# Altium PCB HANDS_FREE_ControlUnit_V2.PcbDoc (part 2 of 3)
Units mil, origin at the board's own origin, x right, y up, seen from the top; angles counter-clockwise.
Board outline 2130 x 3330 mil, 2 copper layers (Top Layer, Bottom Layer); 111 components, 108 nets, 500 pads, 191 vias.
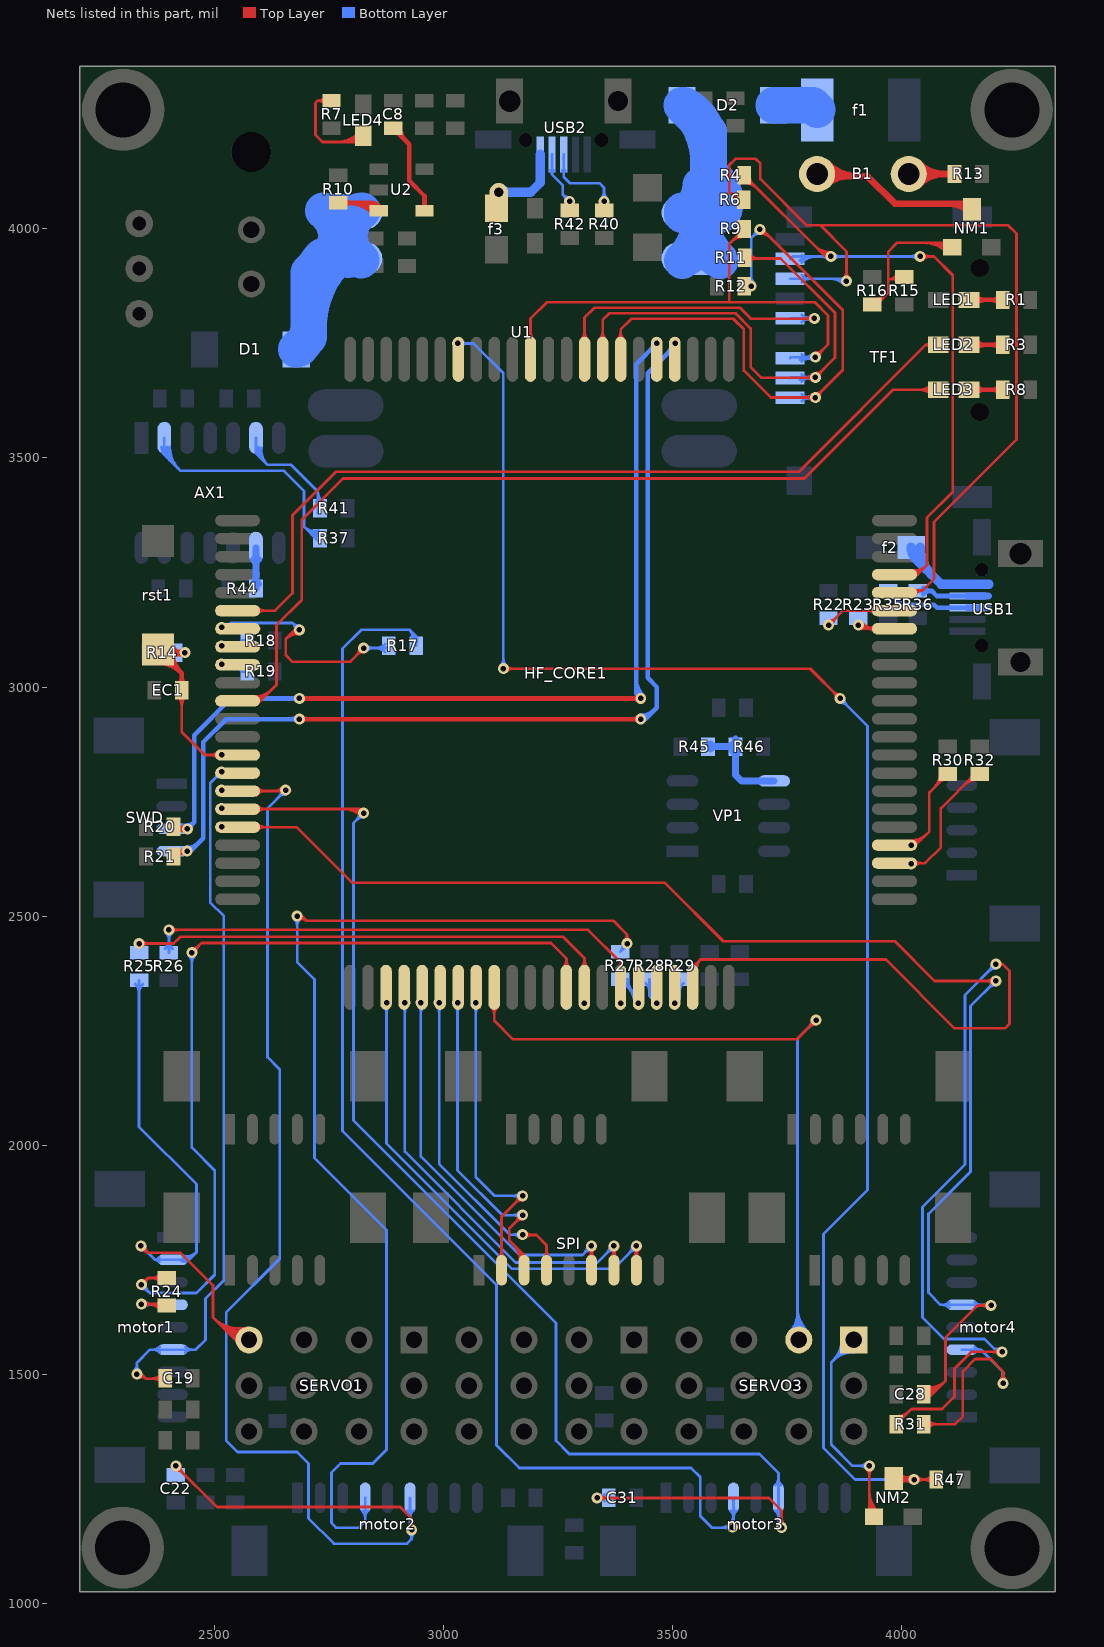
[diagram p2: the nets of this part, all layers, seen from the top]

## Via types
v1: diameter 24, hole 12, Top Layer to Bottom Layer, 168 vias
v2: diameter 40, hole 20, Top Layer to Bottom Layer, 10 vias
v3: diameter 30, hole 15, Top Layer to Bottom Layer, 10 vias
v4: diameter 80, hole 40, Top Layer to Bottom Layer, 3 vias

## Nets (pads, with @x,y where several pads share a name; then routed paths per layer and width w, separated by ;. In a path a pad name is that pad's centre, name@x,y a point inside that pad or via, vN(x,y) a via of type N, cw(c..) or ccw(c..) an arc to the next point about the centre after c; other vN are vias at no path point) (continued)
LED2: HF_CORE1.6 LED2.2 | length 1929
  Top Layer w6: HF_CORE1.6@2550,3166.64 2631.64,3166.64 2670,3205 2670,3375 2765,3470 3775,3470 4052,3747 ; HF_CORE1.6@2593.43,3159.92 cw(c2609.65,3143.71) 2609.65,3166.64 cw(c2609.65,3189.58) HF_CORE1.6@2593.43,3173.36 ; LED2.2@4061.33,3740.97 ccw(c4052,3736.77) 4052,3747 ; LED2.2@4061.33,3753.03 cw(c4052,3757.23) 4052,3747 ; LED2.2@4079.54,3747 4052,3747
LED3: HF_CORE1.11 LED3.2 | length 2183.4
  Top Layer w6: HF_CORE1.11@2550,2969.79 2599.79,2969.79 ; HF_CORE1.11@2586.71,2967.29 ccw(c2586.71,2992.83) 2604.77,2974.77 ; HF_CORE1.11@2586.71,2973.29 ccw(c2586.71,3013.31) 2615.01,2985.01 ; HF_CORE1.11@2586.71,2979.29 ccw(c2586.71,3033.8) 2625.25,2995.25 ; HF_CORE1.11@2595.75,2966.85 cw(c2599.79,2965.54) 2599.79,2969.79 ; HF_CORE1.11@2595.75,2972.73 ccw(c2599.79,2974.04) 2599.79,2969.79 ; LED3.2@4064.35,3638.59 ccw(c4039.22,3613.47) 4039.22,3649 ccw(c4039.22,3684.53) LED3.2@4064.35,3659.41 ; LED3.2@4068.59,3642.84 ccw(c4053.71,3627.96) 4053.71,3649 ccw(c4053.71,3670.04) LED3.2@4068.59,3655.16 ; LED3.2@4079.54,3649 3980.97,3649 3786.97,3455 2780,3455 2690,3365 2690,3190 2635,3135 2635,3005 2599.79,2969.79
MOTOR1_ADC: C19.2 HF_CORE1.15 motor1.6 | length 1784.2
  Top Layer w6: v1(2330,1500) 2340,1500 2350,1490 ; v1@2331.47,1497.38 cw(c2336.76,1487.96) 2344.4,1495.6 ; v1@2334.4,1492.15 cw(c2340.78,1480.78) 2350,1490 ; 2360.62,1490 ccw(c2360.62,1522.38) C19.2@2383.51,1499.48 ; 2365.44,1490 cw(c2365.44,1464.44) C19.2@2383.51,1482.51 ; 2375.1,1490 ccw(c2375.1,1507.9) C19.2@2387.76,1495.24 ; C19.2@2392,1508 C19.2@2392,1491 2391,1490 2350,1490
  Bottom Layer w6: v1@2323.64,1506.36 ccw(c2308.27,1521.73) 2330,1521.73 ccw(c2351.73,1521.73) v1@2336.36,1506.36 ; v1(2330,1500) 2330,1525 2358.57,1553.57 motor1.6@2408,1553.57 2458.57,1553.57 2480,1575 2480,1665 2520,1705 2520,2500 2490,2530 2490,2790 v1(2515,2815) ; motor1.6@2380.12,1547.34 ccw(c2365.07,1532.3) 2365.07,1553.57 ccw(c2365.07,1574.85) motor1.6@2380.12,1559.81 ; motor1.6@2435.88,1547.34 cw(c2450.93,1532.3) 2450.93,1553.57 cw(c2450.93,1574.85) motor1.6@2435.88,1559.81 ; v1@2506,2815 cw(c2484.27,2815) 2499.64,2799.64 cw(c2515,2784.27) v1@2515,2806
MOTOR1_EN: motor1.4 R24.2 | length 289.4
  Top Layer w6: v1(2340,1653) 2392,1653 R24.2@2395,1650 ; v1@2346.36,1646.64 cw(c2361.73,1631.27) 2361.73,1653 cw(c2361.73,1674.73) v1@2346.36,1659.36 ; 2353.79,1653 cw(c2353.79,1613.78) R24.2@2381.52,1641.51 ; R24.2@2381.52,1658.48 cw(c2368.27,1671.73) 2368.27,1653 cw(c2368.27,1628.27) R24.2@2385.76,1645.76
  Bottom Layer w6: v1@2341.43,1651.57 motor1.4@2408,1651.57 ; v1@2346.36,1646.64 cw(c2358.29,1634.71) 2358.29,1651.57 ; v1@2346.36,1659.36 ccw(c2365.17,1678.17) 2365.17,1651.57 ; motor1.4@2380.12,1645.34 ccw(c2365.07,1630.3) 2365.07,1651.57 ccw(c2365.07,1672.85) motor1.4@2380.12,1657.81
MOTOR2_ADC: C22.2 HF_CORE1.16 motor2.6 | length 3157.4
  Top Layer w6: v1@2415,1291 cw(c2415,1269.27) 2430.36,1284.64 cw(c2445.73,1300) v1@2424,1300 ; v1(2415,1300) 2505,1210 2905,1210 2930,1185 v1(2930,1160) ; HF_CORE1.16@2552.06,2775 HF_CORE1.16@2550,2772.94 v1@2665,2772.94 ; HF_CORE1.16@2593.43,2766.22 cw(c2609.65,2750.01) 2609.65,2772.94 cw(c2609.65,2795.88) HF_CORE1.16@2593.43,2779.66 ; 2628.3,2772.94 ccw(c2628.3,2801.7) v1@2648.64,2781.36 ; 2638.25,2772.94 cw(c2638.25,2758.25) v1@2648.64,2768.64 ; 2642.78,2772.94 ccw(c2642.78,2787.22) v1@2652.88,2777.12 ; v1@2923.64,1166.36 ccw(c2908.27,1181.73) 2930,1181.73 ccw(c2951.73,1181.73) v1@2936.36,1166.36
  Bottom Layer w6: v1@2646,2775 cw(c2624.27,2775) 2639.64,2759.64 cw(c2655,2744.27) v1@2655,2766 ; v1(2655,2775) 2615,2735 2615,2192 2642,2165 2642,1752 2525,1635 2525,1355 2550,1330 2680,1330 2705,1305 2705,1185 2760,1130 2920,1130 2930,1140 ; motor2.6@2920.19,1202.12 cw(c2905.15,1187.07) 2926.43,1187.07 cw(c2947.7,1187.07) motor2.6@2932.66,1202.12 ; v1@2923.64,1166.36 ccw(c2916.9,1173.1) 2926.43,1173.1 ; v1@2924.03,1153.26 cw(c2912.28,1140) 2930,1140 ; v1@2926.43,1163.57 motor2.6@2926.43,1230 ; 2926.43,1175.87 ccw(c2945.87,1175.87) v1@2932.12,1162.12 ; 2926.43,1190.36 ccw(c2960.36,1190.36) v1@2936.36,1166.36 ; v1(2930,1160) 2930,1140 ; v1@2935.97,1153.26 ccw(c2947.72,1140) 2930,1140
  other v1: 2515,2775
MOTOR2_EN: motor2.4 R27.2 | length 2570.5
  Top Layer w6: v1(2680,2500) 2690,2500 2700,2490 ; v1@2681.47,2497.38 cw(c2686.76,2487.96) 2694.4,2495.6 ; v1@2684.4,2492.15 cw(c2690.78,2480.78) 2700,2490 ; v1@3394.03,2446.74 ccw(c3382.28,2460) 3400,2460 ; v1(3400,2440) 3400,2460 ; v1@3405.97,2446.74 cw(c3417.72,2460) 3400,2460 ; 2700,2490 3370,2490 3400,2460
  Bottom Layer w6: v1@2673.64,2493.64 cw(c2658.27,2478.27) 2680,2478.27 cw(c2701.73,2478.27) v1@2686.36,2493.64 ; v1(2680,2500) 2680,2400 2718,2362 2718,1972 2875,1815 2875,1335 2845,1305 2775,1305 2755,1285 2755,1175 2765,1165 2815,1165 2828.43,1178.43 motor2.4@2828.43,1230 ; motor2.4@2822.19,1202.12 cw(c2807.15,1187.07) 2828.43,1187.07 cw(c2849.7,1187.07) motor2.4@2834.66,1202.12 ; R27.2@3389.76,2426.76 cw(c3400,2416.52) R27.2@3400,2431 ; v1@3391.05,2439.06 cw(c3370.13,2436.88) R27.2@3385,2422 3400,2437 v1(3400,2440)
MOTOR3_ADC: C31.2 HF_CORE1.17 motor3.6 | length 3388.8
  Top Layer w6: HF_CORE1.17@2550,2733.57 2816.43,2733.57 ; HF_CORE1.17@2593.43,2726.85 cw(c2609.65,2710.64) 2609.65,2733.57 cw(c2609.65,2756.51) HF_CORE1.17@2593.43,2740.29 ; 2782.58,2733.57 cw(c2782.58,2682.58) v1@2818.64,2718.64 ; 2797.07,2733.57 cw(c2797.07,2697.07) v1@2822.88,2722.88 ; 2811.55,2733.57 cw(c2811.55,2711.55) v1@2827.12,2727.12 ; v1@2817.07,2729.25 ccw(c2813.84,2730.98) 2816.43,2733.57 ; v1@2820.75,2732.93 cw(c2819.02,2736.16) 2816.43,2733.57 ; v1(2825,2725) 2816.43,2733.57 ; v1(3335,1230) 3710,1230 3737.5,1202.5 v1(3737.5,1165) ; v1@3341.36,1223.64 cw(c3356.73,1208.27) 3356.73,1230 cw(c3356.73,1251.73) v1@3341.36,1236.36 ; v1@3731.14,1171.36 ccw(c3715.77,1186.73) 3737.5,1186.73 ccw(c3759.23,1186.73) v1@3743.86,1171.36
  Bottom Layer w6: v1@2816,2725 cw(c2794.27,2725) 2809.64,2709.64 cw(c2825,2694.27) v1@2825,2716 ; v1(2825,2725) 2803,2703 2803,2053.97 3245,1611.97 3245,1355 3274,1326 3689,1326 3730.43,1284.57 motor3.6@3730.43,1230 v1@3730.43,1172.07 ; v1@3341.36,1223.64 cw(c3356.73,1208.27) 3356.73,1230 cw(c3356.73,1251.73) v1@3341.36,1236.36 ; C31.2@3350.64,1222.49 ccw(c3335,1209.96) v1(3335,1230) ; C31.2@3350.64,1237.51 cw(c3335,1250.04) v1(3335,1230) ; C31.2@3360,1230 v1(3335,1230) ; motor3.6@3724.19,1202.12 cw(c3709.15,1187.07) 3730.43,1187.07 cw(c3751.7,1187.07) motor3.6@3736.66,1202.12 ; motor3.6@3724.19,1257.88 ccw(c3709.15,1272.93) 3730.43,1272.93 ccw(c3751.7,1272.93) motor3.6@3736.66,1257.88 ; 3730.43,1174.84 ccw(c3747.34,1174.84) v1@3735.38,1162.88 ; 3730.43,1189.32 ccw(c3761.82,1189.32) v1@3739.62,1167.12 ; motor3.6@3730.43,1203.81 ccw(c3776.31,1203.81) v1@3743.86,1171.36
  other v1: 2515,2735
MOTOR3_EN: motor3.4 R17.2 | length 2973.3
  Top Layer w6: v1(3630,1166) v1@3632,1168
  Bottom Layer w6: R17.2@2929.2,3100.22 ccw(c2909.66,3109.66) 2925,3125 ; 2930.97,3119.03 cw(c2917.71,3105.77) R17.2@2934.6,3097.61 ; 2936.94,3113.06 cw(c2925.76,3101.88) R17.2@2940,3095 ; R17.2@2940,3090 2940,3110 2925,3125 ; 3605.86,1165 ccw(c3605.86,1190.14) 3623.64,1172.36 ccw(c3602.42,1193.58) 3632.43,1193.58 ; 3610.69,1165 cw(c3610.69,1146.69) v1@3623.64,1159.64 ; motor3.4@3626.19,1202.12 cw(c3611.15,1187.07) 3632.43,1187.07 cw(c3653.7,1187.07) motor3.4@3638.66,1202.12 ; v1@3627.88,1168.12 ccw(c3616.9,1179.1) 3632.43,1179.1 ; 3632.43,1181.87 ccw(c3645.87,1181.87) v1@3636.36,1172.36 ; motor3.4@3632.43,1230 3632.43,1168.43 v1(3630,1166) 3629,1165 3585,1165 3560,1190 3560,1275 3540,1295 3165,1295 3115,1345 3115,1695 2779,2031 2779,3084 2820,3125 2925,3125
MOTOR4_ADC: C28.2 HF_CORE1.18 motor4.6 | length 3397.2
  Top Layer w6: HF_CORE1.18@2550,2694.2 2678.83,2694.2 2800.03,2573 3482,2573 3610,2445 3985,2445 4071.67,2358.33 v1(4205,2358.33) ; HF_CORE1.18@2593.43,2687.48 cw(c2609.65,2671.27) 2609.65,2694.2 cw(c2609.65,2717.14) HF_CORE1.18@2593.43,2700.92 ; C28.2@4045.15,1449.34 ccw(c4050.11,1469.6) 4064.86,1454.86 ; C28.2@4046.57,1455.17 ccw(c4053.07,1481.71) 4072.39,1462.39 ; C28.2@4048,1456 4066,1456 ; C28.2@4048,1461 ccw(c4056.04,1493.82) 4079.93,1469.93 ; C28.2@4049.43,1466.83 ccw(c4059,1505.93) 4087.46,1477.46 ; C28.2@4050.85,1472.66 ccw(c4061.96,1518.03) 4095,1485 ; C28.2@4059.08,1451.39 cw(c4066,1448.5) 4066,1456 ; C28.2@4059.08,1460.62 ccw(c4066,1463.5) 4066,1456 ; v1@4188.64,1643.64 ccw(c4173.27,1628.27) 4173.27,1650 ccw(c4173.27,1671.73) v1@4188.64,1656.36 ; v1(4195,1650) 4165,1650 4095,1580 4095,1485 ; v1@4198.64,2351.97 ccw(c4183.27,2336.61) 4183.27,2358.33 ccw(c4183.27,2380.06) v1@4198.64,2364.7 ; 4066,1456 4095,1485
  Bottom Layer w6: motor4.6@4103.12,1645.19 ccw(c4088.07,1630.15) 4088.07,1651.43 ccw(c4088.07,1672.7) motor4.6@4103.12,1657.66 ; motor4.6@4158.88,1645.19 cw(c4173.93,1630.15) 4173.93,1651.43 cw(c4173.93,1672.7) motor4.6@4158.88,1657.66 ; 4169.83,1651.43 cw(c4169.83,1624.83) v1@4188.64,1643.64 ; 4176.71,1651.43 ccw(c4176.71,1668.29) v1@4188.64,1656.36 ; v1(4195,1650) 4193.57,1651.43 motor4.6@4131,1651.43 4084.57,1651.43 4058,1678 4058,1850 4150,1942 4150,2303.33 v1(4205,2358.33) ; v1@4196,2358.33 cw(c4174.27,2358.33) 4189.64,2342.97 cw(c4205,2327.61) v1@4205,2349.33
  other v1: 2515,2695
MOTOR4_EN: motor4.4 R31.2 | length 605.4
  Top Layer w6: R31.2@4048,1391 4116,1391 4133,1408 4133,1506 4160,1533 4194,1533 4221,1506 v1(4221,1480) ; R31.2@4056.49,1382.52 cw(c4076.97,1362.03) 4076.97,1391 cw(c4076.97,1419.97) R31.2@4056.49,1399.49 ; v1@4214.64,1486.36 ccw(c4199.27,1501.73) 4221,1501.73 ccw(c4242.73,1501.73) v1@4227.36,1486.36
  Bottom Layer w6: motor4.4@4131,1553.43 4172.57,1553.43 ; motor4.4@4159.17,1547.5 cw(c4172.57,1535.31) 4172.57,1553.43 ; motor4.4@4159.17,1559.35 ccw(c4172.57,1571.54) 4172.57,1553.43 ; v1@4214.64,1486.36 ccw(c4199.27,1501.73) 4221,1501.73 ccw(c4242.73,1501.73) v1@4227.36,1486.36 ; v1(4221,1480) 4221,1505 4172.57,1553.43
NetAX1_2: AX1.2 R37.1 | length 746.6
  Bottom Layer w6: AX1.2@2384,3524 ccw(c2410.56,3524) 2391.78,3505.22 ; AX1.2@2385.98,3512.69 cw(c2383.96,3507) 2390,3507 ; AX1.2@2390,3524 ccw(c2431.04,3524) 2402.02,3494.98 ; AX1.2@2390,3544 2390,3507 ; AX1.2@2394.02,3512.69 ccw(c2396.04,3507) 2390,3507 ; AX1.2@2396,3524 ccw(c2451.53,3524) 2412.26,3484.74 ; AX1.2@2402,3524 ccw(c2472.01,3524) 2422.51,3474.49 ; 2702.3,3342.7 ccw(c2721.3,3361.7) R37.1@2728.41,3335.79 ; 2709.6,3335.4 ccw(c2724.45,3350.25) R37.1@2730,3330 ; R37.1@2725,3320 2695,3350 ; R37.1@2726.83,3341.57 cw(c2718.16,3373.16) 2695,3350 ; 2390,3507 2425,3472 2651,3472 2695,3428 2695,3350
NetAX1_6: AX1.6 R41.2 | length 401.3
  Bottom Layer w6: AX1.6@2590,3524 ccw(c2615.91,3520.98) 2597.46,3502.54 ; AX1.6@2590,3544 2590,3510 2615,3485 ; AX1.6@2595.96,3523.31 ccw(c2631.61,3519.15) 2606.23,3493.77 ; AX1.6@2601.92,3522.61 ccw(c2647.32,3517.32) 2615,3485 ; R41.2@2721.51,3403.49 ccw(c2713.1,3411.9) 2725,3411.9 ; R41.2@2725,3380 2725,3427 ; 2725,3415.7 ccw(c2743.99,3415.7) R41.2@2733.36,3399.97 ; R41.2@2736.72,3404.94 cw(c2751.61,3427) 2725,3427 ; 2615,3485 2667,3485 2725,3427
NetAX1_9: AX1.9 R44.1 | length 145.9
  Bottom Layer w15: R44.1@2584.7,3225.3 ccw(c2571.89,3238.11) 2590,3238.11 ccw(c2608.11,3238.11) R44.1@2595.3,3225.3 ; AX1.9@2584.7,3278.7 cw(c2571.89,3265.89) 2590,3265.89 cw(c2608.11,3265.89) AX1.9@2595.3,3278.7 ; R44.1@2590,3215 AX1.9@2590,3304
NetB1_1: B1.1 R13.2 | length 297.3
  Top Layer w15: B1.1@4022,4115 4027,4120 R13.2@4104,4120 ; B1.1@4026.93,4108.07 cw(c4055.73,4079.27) 4055.73,4120 cw(c4055.73,4160.73) B1.1@4026.93,4131.93 ; B1.1@4037.54,4097.46 cw(c4091.94,4043.06) 4091.94,4120 cw(c4091.94,4196.94) B1.1@4037.54,4142.54 ; R13.2@4109.7,4114.7 ccw(c4096.89,4101.89) 4096.89,4120 ccw(c4096.89,4138.11) R13.2@4109.7,4125.3
NetB1_2: B1.2 NM1.3 | length 576.5
  Top Layer w15: B1.2@3815,4115 3925,4115 3985,4055 4141,4055 NM1.3@4153,4043 ; B1.2@3826.93,4131.93 ccw(c3867.8,4172.8) 3867.8,4115 ; B1.2@3837.54,4097.46 cw(c3879.87,4055.13) 3879.87,4115 ; B1.2@3837.54,4142.54 ccw(c3904.01,4209.01) 3904.01,4115 ; 4105.92,4055 cw(c4105.92,4000.92) NM1.3@4144.16,4039.16
NetC8_2: C8.2 U2.4 | length 274.5
  Top Layer w10: C8.2@2890.02,4220 2925,4185.02 2925,4105 2958,4072 U2.4@2958,4040 ; C8.2@2895.02,4210 cw(c2895.02,4197.93) C8.2@2903.56,4206.46 ; C8.2@2905.02,4220 ccw(c2941.23,4220) 2915.63,4194.39 ; U2.4@2952.7,4045.3 ccw(c2939.89,4058.11) 2958,4058.11 ccw(c2976.11,4058.11) U2.4@2963.3,4045.3
NetD1_2: D1.2 U1.7 U1.8 | length 1601.4
  Bottom Layer w80: D1.2@2678,3737 2705,3764 2705,3905 2735.35,3935.35 U1.7@2779.79,3935.35 U1.8@2779.79,4035.35 ; D1.2@2685.41,3739.44 ccw(c2638.1,3786.74) 2705,3786.74 ; 2705,3784.84 cw(c2922.42,3784.84) U1.7@2768.68,3938.58 ; 2705,3861.88 cw(c2784.03,3861.88) U1.7@2771.17,3939.86 ; 2705,3870.03 cw(c2801.95,3870.03) U1.7@2733.4,3938.58 ; U1.7@2717.3,3917.3 cw(c2771.91,3862.69) U1.7@2771.91,3939.92 ; U1.8@2737.14,4039.89 cw(c2731.79,3992.2) 2779.79,3992.2 ; U1.7@2739.86,3932.13 ccw(c2643.46,4028.52) U1.8@2779.79,4028.52 ; U1.8@2739.86,4038.58 cw(c2643.46,3942.19) U1.7@2779.79,3942.19 ; 2767.59,3980.16 ccw(c2807.84,3956.93) U1.7@2768,3933 ; 2767.59,3990.54 cw(c2807.84,4013.78) U1.8@2768,4037.71 ; U1.7@2779.79,3942.86 cw(c2915.16,3942.86) U1.8@2819.44,4038.58 ; 2779.79,3992.48 cw(c2827.5,3992.48) U1.8@2822.15,4039.89 ; U1.8@2779.79,4027.85 ccw(c2915.16,4027.85) U1.7@2819.44,3932.13 ; U1.7@2791.59,3933.02 ccw(c2751.75,3956.69) 2791.88,3979.86 ; U1.8@2791.59,4037.69 cw(c2751.75,4014.02) 2791.88,3990.85
NetD2_1: D2.1 U1.1 U1.2 | length 1408.6
  Bottom Layer w80: D2.1@3520,4270 3578,4212 3578,4124 ; U1.1@3520.6,4039.51 cw(c3492.47,3977.4) 3560.67,3977.4 ; U1.2@3520.73,3931.26 ccw(c3489.26,3995.35) 3560.67,3995.35 ; U1.1@3520.73,4031.26 ccw(c3489.26,4095.35) 3560.67,4095.35 ; U1.2@3521.95,3932.13 ccw(c3428.48,4025.59) U1.1@3560.67,4025.59 ; D2.1@3524.51,4269.61 cw(c3483.98,4184.77) 3578,4184.77 ; D2.1@3527.41,4267.56 cw(c3405.26,4145.42) 3578,4145.42 ; 3560.67,3975.92 cw(c3629.76,3975.92) U1.1@3602.85,4039.56 ; U1.1@3560.67,4032.26 ccw(c3702.28,4032.26) U1.2@3602.14,3932.13 ; U1.1@3602.81,4031.16 cw(c3630.62,4095.35) 3560.67,4095.35 ; U1.2@3603.63,3931.13 cw(c3630.14,3995.35) 3560.67,3995.35 ; U1.1@3608.85,4033.61 ccw(c3545.68,4059.68) 3594,4108 3578,4124 ; U1.1@3609.16,4034.84 ccw(c3501.1,4047.09) 3578,4124 ; 3560.67,3995.35 3560.67,4095.35
NetD2_2: D2.2 f1.1 | length 99.1
  Bottom Layer w80: D2.2@3720,4270 3805,4270 f1.1@3815,4260
Netf2_1: f2.1 USB1.1 | length 298.3
  Bottom Layer w20: f2.1@4020,3305 ccw(c4056.21,3305) 4030.61,3279.39 ; f2.1@4026.14,3298.86 4026.14,3283.86 4085.71,3224.29 4190,3224.29 ; f2.1@4040,3305 ccw(c4124.5,3305) 4064.75,3245.25
Netf3_1: f3.1 USB2.1 | length 267.9
  Top Layer w20: f3.1@3115,4044.65 cw(c3154.16,4044.65) f3.1@3126.95,4072.81 ; f3.1@3115,4045 3115,4075 v2(3120,4080)
  Bottom Layer w20: v2(3120,4080) 3190,4080 3210.71,4100.71 USB2.1@3210.71,4162.86 ; v2@3127.07,4072.93 cw(c3144.14,4055.86) 3144.14,4080 cw(c3144.14,4104.14) v2@3127.07,4087.07
NetHF_CORE1_7: HF_CORE1.7 R17.1 | length 779.6
  Top Layer w6: HF_CORE1.7@2550,3127.27 HF_CORE1.7@2597.73,3127.27 ; 2664.33,3114.33 cw(c2683,3095.66) v1@2684.8,3122.01 ; v1@2684.39,3116.02 ccw(c2681.82,3078.19) 2655,3105 ; v1(2685,3125) 2675,3125 2655,3105 ; v1@2816,3085 cw(c2794.27,3085) 2809.64,3069.64 cw(c2825,3054.27) v1@2825,3076 ; v1(2825,3085) 2795,3055 2670,3055 2655,3070 2655,3105
  Bottom Layer w6: v1(2515,3130) 2525,3130 2535,3140 ; v1@2516.47,3132.62 ccw(c2521.76,3142.04) 2529.4,3134.4 ; v1@2519.4,3137.85 ccw(c2525.78,3149.22) 2535,3140 ; v1@2676,3125.15 ccw(c2655.51,3125.51) 2670,3140 ; v1@2684.85,3134 cw(c2684.49,3154.49) 2670,3140 ; v1(2685,3125) 2670,3140 ; v1(2825,3085) 2875,3085 R17.1@2880,3090 ; v1@2831.36,3078.64 cw(c2846.73,3063.27) 2846.73,3085 cw(c2846.73,3106.73) v1@2831.36,3091.36 ; R17.1@2871.52,3076.51 ccw(c2851.03,3056.03) 2851.03,3085 ccw(c2851.03,3113.97) R17.1@2871.52,3093.48 ; 2535,3140 2670,3140
NetHF_CORE1_8: HF_CORE1.8 R18.1 | length 94.9
  Bottom Layer w6: v1(2515,3090) 2548.5,3090 2560,3101.5 R18.1@2571,3101.5 ; v1@2521.36,3083.64 cw(c2536.73,3068.27) 2536.73,3090 cw(c2536.73,3111.73) v1@2521.36,3096.36
NetHF_CORE1_9: HF_CORE1.9 R19.1 | length 157.5
  Bottom Layer w6: v1(2515,3050) 2544,3050 ; v1@2521.36,3043.64 cw(c2536.73,3028.27) 2536.73,3050 cw(c2536.73,3071.73) v1@2521.36,3056.36 ; 2548.89,3045.11 ccw(c2558.9,3055.12) R19.1@2567.4,3043.8 ; 2553.78,3040.22 ccw(c2563.09,3049.53) R19.1@2571,3039 ; R19.1@2563.8,3048.6 cw(c2554.71,3060.71) 2544,3050 ; R19.1@2571,3034 2560,3034 2544,3050
NetHF_CORE1_35: HF_CORE1.35 R24.1 | length 2087.8
  Top Layer w6: v1(2340,1695.33) 2354.67,1710 ; v1@2340.3,1704.33 ccw(c2340.95,1723.71) 2354.67,1710 ; v1@2348.99,1695.63 cw(c2368.38,1696.28) 2354.67,1710 ; R24.1@2381.52,1701.51 ccw(c2361.03,1681.03) 2361.03,1710 ccw(c2361.03,1738.97) R24.1@2381.52,1718.48 ; R24.1@2395,1710 2354.67,1710 ; v1(2450,2420) 2471,2441 3234,2441 3267.67,2407.33 HF_CORE1.35@3267.67,2344.5 ; v1@2450,2429 ccw(c2450,2450.73) 2465.36,2435.36 ccw(c2480.73,2420) v1@2459,2420 ; HF_CORE1.35@3260.95,2387.93 ccw(c3244.74,2404.15) 3267.67,2404.15 ccw(c3290.61,2404.15) HF_CORE1.35@3274.39,2387.93
  Bottom Layer w6: v1@2340,1686.33 cw(c2340,1664.61) 2355.36,1679.97 cw(c2370.73,1695.33) v1@2349,1695.33 ; v1(2340,1695.33) 2358.33,1677 2460,1677 2500,1717 2500,1945 2450,1995 v1(2450,2420) ; v1@2443.64,2413.64 cw(c2428.27,2398.27) 2450,2398.27 cw(c2471.73,2398.27) v1@2456.36,2413.64
NetHF_CORE1_36: HF_CORE1.36 R25.1 | length 1131.4
  Top Layer w6: v1(2335,2440) 2410,2440 2425,2455 3260,2455 3307.04,2407.96 HF_CORE1.36@3307.04,2344.5 ; v1@2341.36,2433.64 cw(c2356.73,2418.27) 2356.73,2440 cw(c2356.73,2461.73) v1@2341.36,2446.36 ; HF_CORE1.36@3300.32,2387.93 ccw(c3284.11,2404.15) 3307.04,2404.15 ccw(c3329.97,2404.15) HF_CORE1.36@3313.76,2387.93
  other v1: 3307.04,2310
NetHF_CORE1_38: HF_CORE1.38 R26.1 | length 1257.5
  Top Layer w6: v1(2400,2470) 3315,2470 3385.78,2399.22 ; v1@2406.36,2463.64 cw(c2421.73,2448.27) 2421.73,2470 cw(c2421.73,2491.73) v1@2406.36,2476.36 ; HF_CORE1.38@3380.42,2389.05 ccw(c3373.47,2399.22) 3385.78,2399.22 ; HF_CORE1.38@3385.78,2344.5 3385.78,2399.22 ; HF_CORE1.38@3391.14,2389.05 cw(c3398.09,2399.22) 3385.78,2399.22
  Bottom Layer w6: R26.1@2391.51,2428.48 ccw(c2371.03,2448.97) 2400,2448.97 ccw(c2428.97,2448.97) R26.1@2408.48,2428.48 ; v1@2393.64,2463.64 cw(c2378.27,2448.27) 2400,2448.27 cw(c2421.73,2448.27) v1@2406.36,2463.64 ; R26.1@2400,2420 v1(2400,2470)
  other v1: 3386,2310
NetHF_CORE1_39: HF_CORE1.39 R27.1 | length 220.3
  Bottom Layer w6: R27.1@3385,2362 3425,2322 v1(3425,2310) ; R27.1@3390,2350 cw(c3390,2333.1) 3401.95,2345.05 ; R27.1@3396,2362 ccw(c3422.56,2362) 3403.78,2343.22 ; 3401.15,2345.85 cw(c3365.3,2310) v1@3416,2310 ; R27.1@3402,2362 ccw(c3443.04,2362) 3414.02,2332.98 ; 3411.39,2335.61 cw(c3385.79,2310) v1@3422,2310 ; 3421.64,2325.36 cw(c3406.27,2310) v1@3428,2310
NetHF_CORE1_40: HF_CORE1.40 R28.1 | length 138.2
  Bottom Layer w6: R28.1@3440.64,2353.51 cw(c3420.15,2333.03) 3449.12,2333.03 cw(c3478.1,2333.03) R28.1@3457.61,2353.51 ; R28.1@3449.12,2362 3449.12,2325.88 v1(3465,2310) ; v1@3456,2310 ccw(c3434.27,2310) 3449.64,2325.36 ccw(c3465,2340.73) v1@3465,2319
NetHF_CORE1_41: HF_CORE1.41 R29.1 | length 102
  Bottom Layer w6: v1(3503.89,2310) 3514.75,2320.86 R29.1@3514.75,2362 ; R29.1@3506.26,2353.51 cw(c3485.78,2333.03) 3514.75,2333.03 cw(c3543.72,2333.03) R29.1@3523.24,2353.51
NetHF_CORE1_42: HF_CORE1.42 R31.1 | length 2550.8
  Top Layer w6: HF_CORE1.42@3543.26,2344.5 3543.26,2388.26 3560,2405 ; HF_CORE1.42@3546.72,2381.74 cw(c3563.87,2384.34) 3551.6,2396.6 ; HF_CORE1.42@3552.65,2382.64 cw(c3578.45,2386.55) 3560,2405 ; R31.1@3988,1391 4021,1424 4088,1424 4115,1451 4115,1512 4152,1549 v1(4219,1549) ; R31.1@3988,1402 ccw(c3988,1428.56) 4006.78,1409.78 ; R31.1@3988,1408 ccw(c3988,1449.04) 4017.02,1420.02 ; R31.1@4000,1396 cw(c4016.9,1396) 4004.95,1407.95 ; v1(4205,2395) 4220,2395 ; v1@4212.64,1542.64 ccw(c4197.27,1527.27) 4197.27,1549 ccw(c4197.27,1570.73) v1@4212.64,1555.36 ; v1@4212.94,2390.76 cw(c4220,2387) 4220,2395 ; v1@4212.94,2399.23 ccw(c4220,2403) 4220,2395 ; 3560,2405 3965,2405 4115,2255 4225,2255 4235,2265 4235,2380 4220,2395
  Bottom Layer w6: v1@4196,2395 cw(c4174.27,2395) 4189.64,2379.64 cw(c4205,2364.27) v1@4205,2386 ; v1(4205,2395) 4138,2328 4138,1958 4045,1865 4045,1624 4092,1577 4180,1577 4202,1555 ; v1@4210.07,1547.88 ccw(c4202,1546.87) 4202,1555 ; v1(4219,1549) 4225,1555 4202,1555
NetHF_CORE1_47: HF_CORE1.47 R32.2 | length 487
  Top Layer w6: HF_CORE1.47@3984,2615.46 4050.46,2615.46 4085,2650 4085,2735 4160,2810 R32.2@4170,2810 ; HF_CORE1.47@3994.75,2615.46 cw(c3994.75,2588.75) HF_CORE1.47@4013.64,2607.64 ; HF_CORE1.47@4001.8,2615.46 ccw(c4001.8,2632.2) HF_CORE1.47@4013.64,2620.36 ; HF_CORE1.47@4026.36,2607.64 cw(c4045.25,2588.75) 4045.25,2615.46 ; HF_CORE1.47@4026.36,2620.36 ccw(c4038.2,2632.2) 4038.2,2615.46 ; HF_CORE1.47@4027.43,2608.74 cw(c4043.65,2592.53) 4043.65,2615.46 cw(c4043.65,2638.4) HF_CORE1.47@4027.43,2622.18 ; 4135.98,2785.98 cw(c4165,2756.95) R32.2@4165,2798 ; 4146.22,2796.22 cw(c4165,2777.44) R32.2@4165,2804 ; 4148.05,2798.05 ccw(c4136.1,2810) R32.2@4153,2810
  other v1: 4020,2614
NetHF_CORE1_48: HF_CORE1.48 R30.2 | length 518.8
  Top Layer w6: HF_CORE1.48@3984,2654.83 3984.17,2655 4030,2655 4060,2685 4060,2770 R30.2@4100,2810 ; HF_CORE1.48@4013.64,2648.64 ccw(c3998.27,2633.27) 3998.27,2655 ccw(c3998.27,2676.73) HF_CORE1.48@4013.64,2661.36 ; HF_CORE1.48@4017.37,2656.44 cw(c4036.52,2645.97) 4030.87,2667.05 ; HF_CORE1.48@4020,2652 ccw(c4020,2668.9) HF_CORE1.48@4031.95,2656.95 ; HF_CORE1.48@4020,2658 ccw(c4020,2689.38) 4042.19,2667.19 ; HF_CORE1.48@4020,2664 ccw(c4020,2709.87) 4052.44,2677.44 ; HF_CORE1.48@4020.71,2658.33 ccw(c4020.71,2688.79) 4042.25,2667.25 ; HF_CORE1.48@4020.71,2664.33 ccw(c4020.71,2709.28) 4052.49,2677.49 ; HF_CORE1.48@4022.63,2653.56 cw(c4053.52,2636.68) 4044.41,2670.68 ; HF_CORE1.48@4024.5,2662.79 ccw(c4030.19,2672.65) 4033.13,2661.66 ; 4070.98,2780.98 ccw(c4041.96,2810) R30.2@4083,2810 ; 4081.22,2791.22 ccw(c4062.44,2810) R30.2@4089,2810 ; 4083.05,2793.05 cw(c4095,2781.1) R30.2@4095,2798
  other v1: 4020,2655
NetHF_CORE1_60: HF_CORE1.60 R23.2 | length 197.5
  Top Layer w6: v1@3902.88,3132.88 ccw(c3916.42,3146.42) 3916.42,3127.27 ; v1(3905,3135) 3912.73,3127.27 HF_CORE1.60@3984,3127.27 ; v1@3907.12,3137.12 ccw(c3930.9,3160.9) 3930.9,3127.27 ; v1@3911.36,3141.36 ccw(c3945.39,3175.39) HF_CORE1.60@3945.39,3127.27 ; HF_CORE1.60@3940.57,3120.55 ccw(c3924.35,3104.34) 3924.35,3127.27 ccw(c3924.35,3150.21) HF_CORE1.60@3940.57,3133.99
NetHF_CORE1_61: HF_CORE1.61 R22.2 | length 227.3
  Top Layer w6: v1(3840,3135) 3871.64,3166.64 HF_CORE1.61@3984,3166.64 ; v1@3840,3144 ccw(c3840,3165.73) 3855.36,3150.36 ccw(c3870.73,3135) v1@3849,3135 ; HF_CORE1.61@3940.57,3159.92 ccw(c3924.35,3143.71) 3924.35,3166.64 ccw(c3924.35,3189.58) HF_CORE1.61@3940.57,3173.36
NetLED1_1: LED1.1 R1.2 | length 159.7
  Top Layer w10: LED1.1@4146.46,3845 R1.2@4220,3845 ; LED1.1@4160.24,3836.01 cw(c4181.95,3814.3) 4181.95,3845 cw(c4181.95,3875.7) LED1.1@4160.24,3853.99 ; R1.2@4212.93,3837.93 ccw(c4195.86,3820.86) 4195.86,3845 ccw(c4195.86,3869.14) R1.2@4212.93,3852.07
NetLED2_1: LED2.1 R3.2 | length 159.7
  Top Layer w10: LED2.1@4146.46,3747 R3.2@4220,3747 ; LED2.1@4160.24,3738.01 cw(c4181.95,3716.3) 4181.95,3747 cw(c4181.95,3777.7) LED2.1@4160.24,3755.99 ; R3.2@4212.93,3739.93 ccw(c4195.86,3722.86) 4195.86,3747 ccw(c4195.86,3771.14) R3.2@4212.93,3754.07
NetLED3_1: LED3.1 R8.2 | length 159.7
  Top Layer w10: LED3.1@4146.46,3649 R8.2@4220,3649 ; LED3.1@4160.24,3640.01 cw(c4181.95,3618.3) 4181.95,3649 cw(c4181.95,3679.7) LED3.1@4160.24,3657.99 ; R8.2@4212.93,3641.93 ccw(c4195.86,3624.86) 4195.86,3649 ccw(c4195.86,3673.14) R8.2@4212.93,3656.07
NetLED4_1: LED4.1 R7.2 | length 383.8
  Top Layer w6: R7.2@2740.64,4272.49 ccw(c2725,4259.96) 2725,4280 ; R7.2@2740.64,4287.5 cw(c2725,4300.04) 2725,4280 ; R7.2@2760,4280 R7.2@2755,4280 2725,4280 ; 2767.34,4190 ccw(c2767.34,4255.41) LED4.1@2813.59,4209.16 ; 2781.83,4190 ccw(c2781.83,4240.92) LED4.1@2817.84,4204.92 ; 2796.31,4190 ccw(c2796.31,4226.44) LED4.1@2822.08,4200.67 ; LED4.1@2824,4203.54 2810.46,4190 2735,4190 2720,4205 2720,4275 2725,4280
NetNM1_1: NM1.1 R15.1 R16.2 | length 618.3
  Top Layer w6: R16.2@3935,3835 R16.2@3945,3825 ; R16.2@3940,3841 ccw(c3940,3867.56) 3958.78,3848.78 ; R16.2@3940,3847 ccw(c3940,3888.04) 3969.02,3859.02 ; R16.2@3945,3835 3970,3860 3970,3890 ; R16.2@3952,3835 cw(c3968.9,3835) 3956.95,3846.95 ; 3980.59,3890 ccw(c3980.59,3906.63) R15.1@3994.85,3898.08 ; 3983.1,3890 cw(c3983.1,3878.1) R15.1@3991.52,3886.51 ; R15.1@3989.71,3901.17 cw(c3970,3912.97) 3970,3890 ; R15.1@4005,3895 4005,3885 4000,3890 3970,3890 ; 4047.64,3970 cw(c4047.64,3899.64) NM1.1@4097.39,3949.39 ; 4062.13,3970 cw(c4062.13,3914.13) NM1.1@4101.64,3953.64 ; 4076.62,3970 cw(c4076.62,3928.62) NM1.1@4105.88,3957.88 ; NM1.1@4091.1,3970 cw(c4091.1,3943.1) NM1.1@4110.12,3962.12 ; NM1.1@4110,3960 4100,3970 3990,3970 3970,3950 3970,3890
  Top Layer w15: R16.2@3935,3835 R16.2@3945,3835
NetNM2_1: NM2.1 SERVO3.1 | length 890.8
  Top Layer w6: v1@3922.64,1293.64 cw(c3907.27,1278.27) 3929,1278.27 cw(c3950.73,1278.27) v1@3935.36,1293.64 ; NM2.1@3926.39,1199.61 ccw(c3920.1,1205.9) NM2.1@3929,1205.9 ; 3929,1215.56 ccw(c3963.56,1215.56) NM2.1@3939.12,1191.12 ; 3929,1230.04 ccw(c3978.04,1230.04) NM2.1@3943.36,1195.36 ; 3929,1244.53 ccw(c3992.53,1244.53) NM2.1@3947.61,1199.61 ; v1(3929,1300) 3929,1199 NM2.1@3939,1189
  Bottom Layer w6: SERVO3.1@3868.47,1575 cw(c3804.43,1575) 3849.71,1529.71 cw(c3895,1484.43) SERVO3.1@3895,1548.47 ; SERVO3.1@3874.47,1575 cw(c3824.91,1575) 3859.96,1539.96 cw(c3895,1504.91) SERVO3.1@3895,1554.47 ; SERVO3.1@3880.47,1575 cw(c3845.4,1575) 3870.2,1550.2 cw(c3895,1525.4) SERVO3.1@3895,1560.47 ; SERVO3.1@3895,1575 3846,1526 3846,1346 3892,1300 v1(3929,1300) ; v1@3922.64,1293.64 ccw(c3907.27,1278.27) 3907.27,1300 ccw(c3907.27,1321.73) v1@3922.64,1306.36
NetR10_2: R10.2 U2.3 | length 270.6
  Top Layer w10: R10.2@2770,4057 2841,4057 ; R10.2@2782.07,4049.93 cw(c2799.14,4032.86) 2799.14,4057 cw(c2799.14,4081.14) R10.2@2782.07,4064.07 ; 2791.35,4057 cw(c2791.35,3980.85) U2.3@2845.2,4034.7 ; 2815.5,4057 cw(c2815.5,4005) U2.3@2852.27,4041.77 ; 2839.64,4057 cw(c2839.64,4029.14) U2.3@2859.34,4048.84 ; U2.3@2843.63,4043.01 ccw(c2832.08,4048.08) 2841,4057 ; U2.3@2858,4040 2841,4057
NetR35_2: R35.2 USB1.3 | length 257.2
  Bottom Layer w10: R35.2@3974.97,3200 cw(c3974.97,3187.87) R35.2@3983.55,3196.45 ; R35.2@3980,3200 4000,3180 4070,3180 4076.89,3173.11 USB1.3@4142.86,3173.11 ; R35.2@3984.97,3210 ccw(c4021.13,3210) 3995.56,3184.44
  Bottom Layer w15: USB1.3@4142.86,3173.11 4188.11,3173.11
NetR36_2: R36.2 USB1.2 | length 196.3
  Bottom Layer w10: R36.2@4035,3210 4065,3210 4076.3,3198.7 USB1.2@4142.86,3198.7 ; R36.2@4047.07,3202.93 cw(c4064.14,3185.86) 4064.14,3210 cw(c4064.14,3234.14) R36.2@4047.07,3217.07
  Bottom Layer w15: USB1.2@4142.86,3198.7 4188.7,3198.7
NetR40_2: R40.2 USB2.3 | length 230
  Bottom Layer w6: USB2.3@3258.44,4127.92 cw(c3250.12,4119.6) 3261.89,4119.6 cw(c3273.66,4119.6) USB2.3@3265.34,4127.92 ; USB2.3@3261.89,4162.86 3261.89,4113.11 3275,4100 3340,4100 3350,4090 v1(3350,4060) ; v1@3343.64,4066.36 ccw(c3328.27,4081.73) 3350,4081.73 ccw(c3371.73,4081.73) v1@3356.36,4066.36
NetR42_2: R42.2 USB2.2 | length 170.3
  Bottom Layer w6: USB2.2@3232.85,4127.92 cw(c3224.53,4119.6) 3236.3,4119.6 cw(c3248.07,4119.6) USB2.2@3239.75,4127.92 ; USB2.2@3236.3,4162.86 3236.3,4118.7 3260,4095 3260,4075 ; v1@3266,4060.15 ccw(c3245.51,4060.51) 3260,4075 ; v1@3274.85,4069 cw(c3274.49,4089.49) 3260,4075 ; v1(3275,4060) 3260,4075
NetR45_1: R45.1 R46.1 VP1.5 | length 313.7
  Bottom Layer w15: R45.1@3577,2870 R46.1@3637,2870 ; R45.1@3582.3,2864.7 cw(c3595.11,2851.89) 3595.11,2870 cw(c3595.11,2888.11) R45.1@3582.3,2875.3 ; R46.1@3631.7,2859.7 cw(c3618.89,2846.89) 3637,2846.89 cw(c3655.11,2846.89) R46.1@3642.3,2859.7 ; R46.1@3631.7,2864.7 ccw(c3618.89,2851.89) 3618.89,2870 ccw(c3618.9,2888.1) R46.1@3631.7,2875.3 ; R46.1@3637,2887 R46.1@3637,2870 ; VP1.5@3721,2795 3650,2795 3637,2808 R46.1@3637,2870
NRST: EC1.1 HF_CORE1.14 R14.2 rst1.2 | length 1056.6
  Top Layer w6: rst1.2@2376,3082.26 2383.26,3075 v1(2435,3075) ; rst1.2@2394.45,3089.98 ccw(c2416.96,3099.41) 2416.96,3075 ; rst1.2@2394.54,3064.04 cw(c2420.69,3038.35) 2420.69,3075 ; rst1.2@2398.82,3059.83 cw(c2435,3024.29) v1(2435,3075) ; rst1.2@2399.98,3092.3 ccw(c2425.98,3103.18) v1@2425.98,3075 ; rst1.2@2405.52,3094.62 ccw(c2435,3106.96) v1(2435,3075) ; 2415.79,3077.73 ccw(c2419.17,3090.31) v1@2428.53,3081.26 ; 2418.85,3076.91 cw(c2415.29,3063.62) v1@2427.21,3070.5 ; EC1.1@2419.51,2979.51 cw(c2399.03,2959.03) 2428,2959.03 cw(c2456.97,2959.03) EC1.1@2436.48,2979.51 ; v1@2426.44,3072.23 ccw(c2416.25,3068.94) 2419.02,3079.28 ccw(c2421.79,3089.62) v1@2428.97,3081.68 ; v1@2427.21,3079.5 cw(c2408.39,3090.36) 2414.01,3069.38 cw(c2419.63,3048.39) v1@2430.5,3067.21 ; EC1.1@2428,2993 2428,2902 2478.32,2851.68 v1(2515,2851.68) HF_CORE1.14@2550,2851.68 ; v1@2428.64,3068.64 ccw(c2413.27,3053.27) 2413.27,3075 ccw(c2413.27,3096.73) v1@2428.64,3081.36 ; HF_CORE1.14@2506.57,2844.96 ccw(c2490.35,2828.75) 2490.35,2851.68 ccw(c2490.35,2874.62) HF_CORE1.14@2506.57,2858.4 ; HF_CORE1.14@2508.64,2845.32 ccw(c2493.27,2829.95) 2493.27,2851.68 ccw(c2493.27,2873.41) HF_CORE1.14@2508.64,2858.04 ; HF_CORE1.14@2521.36,2845.32 cw(c2536.73,2829.95) 2536.73,2851.68 cw(c2536.73,2873.41) HF_CORE1.14@2521.36,2858.04
  Top Layer w10: rst1.2@2376,3052.26 cw(c2376,2979.83) 2427.21,3031.05 cw(c2478.43,3082.26) rst1.2@2406,3082.26 ; rst1.2@2376,3062.26 cw(c2376,3013.98) 2410.14,3048.12 cw(c2444.28,3082.26) rst1.2@2396,3082.26 ; rst1.2@2383.26,3075 2428,3030.26 EC1.1@2428,2993 ; EC1.1@2420.93,3005.07 ccw(c2403.86,3022.14) 2428,3022.14 ccw(c2452.14,3022.14) EC1.1@2435.07,3005.07
PPM: HF_CORE1.31 SERVO3.4 | length 1847.4
  Top Layer w6: HF_CORE1.31@3103.47,2301.07 cw(c3087.26,2284.85) 3110.19,2284.85 cw(c3133.12,2284.85) HF_CORE1.31@3116.91,2301.07 ; HF_CORE1.31@3110.19,2344.5 3110.19,2271.81 3151,2231 3770.57,2231 v1(3812.57,2273) ; v1@3803.57,2273 cw(c3781.85,2273) 3797.21,2257.64 cw(c3812.57,2242.27) v1@3812.57,2264
  Bottom Layer w6: SERVO3.4@3756.24,1593.76 ccw(c3718.2,1631.8) 3772,1631.8 ccw(c3831.8,1631.8) SERVO3.4@3789.52,1589.52 ; SERVO3.4@3760.48,1589.52 ccw(c3732.68,1617.32) 3772,1617.32 ccw(c3817.32,1617.32) SERVO3.4@3785.27,1585.27 ; SERVO3.4@3765,1573 3772,1580 3772,2232.43 v1(3812.57,2273) ; 3772,1646.29 ccw(c3846.29,1646.29) SERVO3.4@3793.76,1593.76 ; v1@3803.57,2273 cw(c3781.85,2273) 3797.21,2257.64 cw(c3812.57,2242.27) v1@3812.57,2264
SBUS: HF_CORE1.82 NM2.3 R47.2 | length 4040.5
  Top Layer w6: v1(3130,3040) 3800,3040 v1(3865,2975) ; v1@3136.36,3033.64 cw(c3151.73,3018.27) 3151.73,3040 cw(c3151.73,3061.73) v1@3136.36,3046.36 ; v1@3856,2975 ccw(c3834.27,2975) 3849.64,2990.36 ccw(c3865,3005.73) v1@3865,2984 ; NM2.3@3982,1272 3984,1270 v1(4027,1270) ; NM2.3@3989.78,1264.22 cw(c4003.73,1250.27) 4003.73,1270 ; NM2.3@3989.88,1279.67 ccw(c4012.79,1301.96) 4012.79,1270 ; NM2.3@3994.02,1259.98 cw(c4018.21,1235.79) v1@4018.21,1270 ; NM2.3@3994.18,1283.86 ccw(c4027,1315.78) v1(4027,1270) ; 4004.91,1266.44 cw(c4009.73,1248.46) v1@4021.37,1262.98 ; 4010.73,1267.99 ccw(c4007.11,1281.48) v1@4019.21,1274.5 ; v1@4019.21,1265.5 ccw(c4000.39,1254.64) 4006.01,1275.62 ccw(c4011.64,1296.61) v1@4022.5,1277.79 ; v1@4020.64,1263.64 ccw(c4005.27,1248.27) 4005.27,1270 ccw(c4005.27,1291.73) v1@4020.64,1276.36 ; v1@4033.36,1263.64 cw(c4048.73,1248.27) 4048.73,1270 cw(c4048.73,1291.73) v1@4033.36,1276.36 ; R47.2@4066.51,1261.51 ccw(c4046.03,1241.03) 4046.03,1270 ccw(c4046.03,1298.97) R47.2@4066.51,1278.48 ; R47.2@4075,1270 v1(4027,1270)
  Bottom Layer w6: v1(3030,3750) 3065,3750 3130,3685 v1(3130,3040) ; v1@3036.36,3743.64 cw(c3051.73,3728.27) 3051.73,3750 cw(c3051.73,3771.73) v1@3036.36,3756.36 ; v1@3123.64,3046.36 ccw(c3108.27,3061.73) 3130,3061.73 ccw(c3151.73,3061.73) v1@3136.36,3046.36 ; v1@3865,2966 cw(c3865,2944.27) 3880.36,2959.64 cw(c3895.73,2975) v1@3874,2975 ; v1(3865,2975) 3925,2915 3925,1902 3829,1806 3829,1339 3898,1270 v1(4027,1270) ; v1@4020.64,1263.64 ccw(c4005.27,1248.27) 4005.27,1270 ccw(c4005.27,1291.73) v1@4020.64,1276.36
SDIO_CK: HF_CORE1.75 TF1.5 | length 855.1
  Top Layer w6: HF_CORE1.75@3300.68,3758.93 ccw(c3284.47,3775.15) 3307.4,3775.15 ccw(c3330.34,3775.15) HF_CORE1.75@3314.12,3758.93 ; HF_CORE1.75@3307.4,3715.5 3307.4,3806.4 3329,3828 3647,3828 3671,3804 v1@3808,3804 ; 3784.86,3804 ccw(c3784.86,3829.14) v1@3802.64,3811.36 ; 3789.69,3804 cw(c3789.69,3785.69) v1@3802.64,3798.64
  Bottom Layer w6: TF1.5@3756.18,3804.65 3756.53,3805 v1(3809,3805) ; TF1.5@3781.52,3797.02 cw(c3800.78,3777.77) v1@3800.78,3805 ; TF1.5@3781.52,3812.27 ccw(c3799.07,3829.82) v1@3799.07,3805 ; 3790.72,3802.31 cw(c3793.75,3791.01) v1@3802.37,3798.92 ; 3790.96,3807.17 ccw(c3793.75,3817.57) v1@3802.05,3810.72 ; 3792.43,3802.76 ccw(c3788.68,3816.73) v1@3801.21,3809.5 ; 3793.34,3806.53 cw(c3789.99,3794.03) v1@3801.21,3800.5 ; v1@3802.64,3798.64 ccw(c3787.27,3783.27) 3787.27,3805 ccw(c3787.27,3826.73) v1@3802.64,3811.36
SDIO_CMD: HF_CORE1.78 R9.1 TF1.3 | length 1350.8
  Top Layer w6: HF_CORE1.78@3182.57,3758.93 ccw(c3166.36,3775.15) 3189.29,3775.15 ccw(c3212.23,3775.15) HF_CORE1.78@3196.01,3758.93 ; HF_CORE1.78@3189.29,3715.5 3189.29,3804.29 3225,3840 3623,3840 ; 3626.98,3970.98 cw(c3656,3941.96) R9.1@3656,3983 ; 3637.22,3981.22 cw(c3656,3962.44) R9.1@3656,3989 ; 3639.05,3983.05 ccw(c3627.1,3995) R9.1@3644,3995 ; R9.1@3656,4000 3623,3967 3623,3840 ; v1(3811,3720) 3839,3748 3839,3811.03 3810.03,3840 3623,3840 ; v1@3811,3729 ccw(c3811,3750.73) 3826.36,3735.36 ccw(c3841.73,3720) v1@3820,3720
  Bottom Layer w6: TF1.3@3756.18,3718.03 3758.15,3720 v1(3811,3720) ; TF1.3@3777.28,3714.65 cw(c3790.19,3701.74) 3790.19,3720 ; TF1.3@3781.52,3710.41 cw(c3804.68,3687.25) v1@3804.68,3720 ; TF1.3@3781.52,3725.65 ccw(c3795.16,3739.3) 3795.16,3720 ; 3791.04,3716.35 cw(c3795.06,3701.33) v1@3805.16,3713.15 ; 3793.41,3716.98 ccw(c3789.23,3732.57) v1@3803.21,3724.5 ; v1@3804.64,3713.64 ccw(c3789.27,3698.27) 3789.27,3720 ccw(c3789.27,3741.73) v1@3804.64,3726.36
SDIO_D0: HF_CORE1.62 R6.1 TF1.7 | length 2297.9
  Top Layer w6: 3628.05,4075.95 ccw(c3641.01,4088.91) R6.1@3651.55,4073.91 ; 3633.1,4070.9 ccw(c3645.18,4082.98) R6.1@3655,4069 ; 3638.15,4065.85 ccw(c3649.35,4077.05) R6.1@3658.45,4064.09 ; R6.1@3648.1,4078.82 cw(c3636.85,4094.85) 3623,4081 ; R6.1@3655,4064 3652,4061 3643,4061 3623,4081 ; 3822,4008 3879,3951 v1@3879,3880 ; v1@3872.64,3892.36 ccw(c3857.27,3907.73) 3879,3907.73 ccw(c3900.73,3907.73) v1@3885.36,3892.36 ; v1@3881,3880 v1@3881,3888 ; HF_CORE1.62@3984,3206.01 3988.99,3211 4045,3211 ; HF_CORE1.62@4023.79,3204.35 cw(c4034.94,3198.33) 4034.94,3211 ; HF_CORE1.62@4029.07,3201.5 cw(c4045,3192.9) 4045,3211 ; 3623,4081 3623,4139 3637,4153 3681,4153 3691,4143 3691,4109 3792,4008 4232,4008 4250,3990 4250,3540 4070,3360 4070,3236 4045,3211
  Bottom Layer w6: TF1.7@3756.18,3891.26 3867.74,3891.26 3879,3880 v1(3879,3886) ; TF1.7@3781.52,3883.64 cw(c3799.92,3865.24) 3799.92,3891.26 cw(c3799.92,3917.28) TF1.7@3781.52,3898.88 ; 3844.57,3891.26 cw(c3844.57,3851.57) v1@3872.64,3879.64 ; 3859.06,3891.26 cw(c3859.06,3866.06) v1@3876.88,3883.88
SDIO_D1: HF_CORE1.63 R4.1 TF1.8 | length 1820
  Top Layer w6: R4.1@3656,4100 cw(c3656,4058.96) 3685.02,4087.98 ; R4.1@3656,4106 cw(c3656,4079.44) 3674.78,4098.22 ; R4.1@3656,4117 3833,3940 v1(3845,3940) ; R4.1@3668,4112 ccw(c3684.9,4112) 3672.95,4100.05 ; 3809.15,3963.85 ccw(c3845,3999.7) v1@3845,3949 ; 3819.39,3953.61 ccw(c3845,3979.22) v1@3845,3943 ; 3829.63,3943.36 ccw(c3845,3958.73) v1@3845,3937 ; HF_CORE1.63@3984,3245.38 4034.38,3245.38 ; HF_CORE1.63@4020.38,3242.9 ccw(c4023.11,3263.51) 4037.81,3248.81 ; HF_CORE1.63@4021.17,3248.85 ccw(c4025.13,3278.68) 4046.4,3257.4 ; HF_CORE1.63@4021.96,3254.8 ccw(c4027.14,3293.86) 4055,3266 ; HF_CORE1.63@4029.62,3242.07 cw(c4034.38,3240.3) 4034.38,3245.38 ; HF_CORE1.63@4029.62,3248.69 ccw(c4034.38,3250.47) 4034.38,3245.38 ; v1(4040,3940) 4070,3940 4111.04,3898.96 4111.04,3426.04 4055,3370 4055,3266 ; v1@4046.36,3933.64 cw(c4061.73,3918.27) 4061.73,3940 cw(c4061.73,3961.73) v1@4046.36,3946.36 ; 4034.38,3245.38 4055,3266
  Bottom Layer w6: TF1.8@3756.18,3934.57 3761.61,3940 v1(3845,3940) v1(4040,3940) ; TF1.8@3777.28,3931.19 cw(c3798.55,3909.91) 3798.55,3940 ; TF1.8@3781.52,3926.94 cw(c3813.04,3895.42) 3813.04,3940 ; TF1.8@3781.52,3942.19 ccw(c3786.8,3947.47) TF1.8@3786.8,3940 ; v1@3838.64,3933.64 ccw(c3823.27,3918.27) 3823.27,3940 ccw(c3823.27,3961.73) v1@3838.64,3946.36 ; v1@3851.36,3933.64 cw(c3866.73,3918.27) 3866.73,3940 cw(c3866.73,3961.73) v1@3851.36,3946.36 ; v1@4033.64,3933.64 ccw(c4018.27,3918.27) 4018.27,3940 ccw(c4018.27,3961.73) v1@4033.64,3946.36
SDIO_D2: HF_CORE1.73 R12.1 TF1.1 | length 1599.9
  Top Layer w6: HF_CORE1.73@3379.42,3758.93 ccw(c3363.21,3775.15) 3386.14,3775.15 ccw(c3409.08,3775.15) HF_CORE1.73@3392.86,3758.93 ; HF_CORE1.73@3386.14,3715.5 3386.14,3780.14 3410,3804 3632,3804 3655,3781 3655,3691 3714,3632 v1(3811,3632) 3871,3692 3871,3823 v1@3692.5,4001.5 ; v1@3690,3990 cw(c3690,3956.2) 3713.9,3980.1 ; v1@3690,3996 cw(c3690,3976.69) 3703.66,3990.34 ; v1@3699,3999 ccw(c3708.66,3999) 3701.83,3992.17 ; v1@3804.64,3625.64 ccw(c3789.27,3610.27) 3789.27,3632 ccw(c3789.27,3653.73) v1@3804.64,3638.36 ; v1@3811,3641 ccw(c3811,3662.73) 3826.36,3647.36 ccw(c3841.73,3632) v1@3820,3632
  Bottom Layer w6: v1@3664.64,3881.36 ccw(c3649.27,3896.73) 3671,3896.73 ccw(c3692.73,3896.73) v1@3677.36,3881.36 ; v1(3671,3875) 3671,3980 v1(3690,3999) ; v1@3681,3999 cw(c3659.27,3999) 3674.64,3983.64 cw(c3690,3968.27) v1@3690,3990 ; TF1.1@3756.18,3631.42 3756.76,3632 v1(3811,3632) ; TF1.1@3781.52,3623.79 cw(c3801.33,3603.98) v1@3801.33,3632 ; TF1.1@3781.52,3639.04 ccw(c3798.51,3656.03) 3798.51,3632 ; 3791.51,3629.37 cw(c3794.95,3616.53) v1@3804.52,3625.75 ; 3795.2,3630.36 ccw(c3791.79,3643.09) v1@3803.21,3636.5 ; v1@3804.64,3625.64 ccw(c3789.27,3610.27) 3789.27,3632 ccw(c3789.27,3653.73) v1@3804.64,3638.36
SDIO_D3: HF_CORE1.74 R11.1 TF1.2 | length 1402.5
  Top Layer w6: HF_CORE1.74@3340.05,3758.93 ccw(c3323.84,3775.15) 3346.77,3775.15 ccw(c3369.71,3775.15) HF_CORE1.74@3353.49,3758.93 ; HF_CORE1.74@3346.77,3715.5 3346.77,3800.77 3362,3816 3637,3816 3670,3783 3670,3699 3694,3675 v1@3811,3675 ; R11.1@3657,3935.5 3735.5,3935.5 3854,3817 3854,3719 v1(3811,3676) ; R11.1@3661.24,3941.24 ccw(c3675.1,3955.11) 3675.1,3935.5 ; R11.1@3665.48,3928.51 cw(c3682.35,3911.65) 3682.35,3935.5 ; R11.1@3665.48,3945.48 ccw(c3689.59,3969.59) 3689.59,3935.5 ; 3786.86,3675 ccw(c3786.86,3700.14) v1@3804.64,3682.36 ; 3791.69,3675 cw(c3791.69,3656.69) v1@3804.64,3669.64 ; v1@3811,3685 ccw(c3811,3706.73) 3826.36,3691.36 ccw(c3841.73,3676) v1@3820,3676
  Bottom Layer w6: TF1.2@3756.18,3674.72 3757.46,3676 v1(3811,3676) ; TF1.2@3777.28,3671.34 cw(c3788.52,3660.1) 3788.52,3676 ; TF1.2@3781.52,3667.1 cw(c3803,3645.62) v1@3803,3676 ; TF1.2@3781.52,3682.35 ccw(c3796.84,3697.67) 3796.84,3676 ; 3791.27,3672.86 cw(c3794.99,3658.99) v1@3804.83,3669.45 ; 3794.3,3673.67 ccw(c3790.51,3687.83) v1@3803.21,3680.5 ; v1@3804.64,3669.64 ccw(c3789.27,3654.27) 3789.27,3676 ccw(c3789.27,3697.73) v1@3804.64,3682.36
SPI1_IOA: HF_CORE1.30 SPI.2 | length 817
  Top Layer w6: SPI.2@3119.98,1754.88 ccw(c3104.94,1769.93) 3126.21,1769.93 ccw(c3147.48,1769.93) SPI.2@3132.44,1754.88 ; SPI.2@3126.21,1727 3126.21,1843.71 v1(3172,1889.5) ; v1@3163,1889.5 cw(c3141.27,1889.5) 3156.64,1874.14 cw(c3172,1858.77) v1@3172,1880.5
  Bottom Layer w6: v1@3063.64,2304.64 cw(c3048.27,2289.27) 3070,2289.27 cw(c3091.73,2289.27) v1@3076.36,2304.64 ; v1(3070,2311) 3070,1930 3110.5,1889.5 v1(3172,1889.5) ; v1@3165.64,1883.14 ccw(c3150.27,1867.77) 3150.27,1889.5 ccw(c3150.27,1911.23) v1@3165.64,1895.86
SPI1_IOB: HF_CORE1.29 SPI.3 | length 874.5
  Top Layer w6: 3152.66,1782.34 cw(c3118.98,1748.65) SPI.3@3166.61,1748.65 ; 3162.9,1772.1 cw(c3139.46,1748.65) SPI.3@3172.61,1748.65 ; v1@3163,1847 cw(c3141.27,1847) 3156.64,1831.64 cw(c3172,1816.27) v1@3172,1838 ; v1(3172,1847) 3143,1818 3143,1792 3175.43,1759.57 SPI.3@3175.43,1727 ; 3173.15,1761.85 cw(c3159.95,1748.65) SPI.3@3178.61,1748.65
  Bottom Layer w6: v1@3023.64,2304.64 cw(c3008.27,2289.27) 3030,2289.27 cw(c3051.73,2289.27) v1@3036.36,2304.64 ; v1(3030,2311) 3030,1945 3128,1847 v1(3172,1847) ; v1@3165.64,1840.64 ccw(c3150.27,1825.27) 3150.27,1847 ccw(c3150.27,1868.73) v1@3165.64,1853.36
SPI1_MISO: HF_CORE1.27 SPI.6 | length 1034.9
  Top Layer w6: v1@3316.06,1773.64 cw(c3300.7,1758.27) 3322.43,1758.27 cw(c3344.15,1758.27) v1@3328.79,1773.64 ; SPI.6@3316.19,1754.88 ccw(c3301.15,1769.93) 3322.43,1769.93 ccw(c3343.7,1769.93) SPI.6@3328.66,1754.88 ; v1@3317.41,1772.52 cw(c3312.88,1765.76) 3320.74,1763.65 ; v1@3317.93,1772.21 cw(c3311.51,1761.1) 3323.9,1764.42 ; 3320.95,1764.42 cw(c3333.34,1761.1) v1@3326.93,1772.21 ; SPI.6@3322.43,1727 v1(3322.43,1780) ; 3324.11,1763.65 cw(c3331.97,1765.76) v1@3327.44,1772.52
  Bottom Layer w6: v1@2943.64,2304.64 cw(c2928.27,2289.27) 2950,2289.27 cw(c2971.73,2289.27) v1@2956.36,2304.64 ; v1(2950,2311) 2950,1975 3165,1760 3302.43,1760 v1(3322.43,1780) ; v1@3313.43,1780 cw(c3291.7,1780) 3307.06,1764.64 cw(c3322.43,1749.27) v1@3322.43,1771
SPI1_MOSI: HF_CORE1.28 SPI.4 | length 850.3
  Top Layer w6: v1(3172,1804.5) 3172.5,1804 3202,1804 3224.43,1781.57 SPI.4@3224.43,1727 ; v1@3178.36,1798.14 cw(c3192.52,1783.98) 3192.52,1804 ; v1@3178.36,1810.86 ccw(c3194.93,1827.43) 3194.93,1804 ; SPI.4@3218.19,1754.88 ccw(c3203.15,1769.93) 3224.43,1769.93 ccw(c3245.7,1769.93) SPI.4@3230.66,1754.88
  Bottom Layer w6: v1@2983.64,2304.64 cw(c2968.27,2289.27) 2990,2289.27 cw(c3011.73,2289.27) v1@2996.36,2304.64 ; v1(2990,2311) 2990,1959 3144.5,1804.5 v1(3172,1804.5) ; v1@3165.64,1798.14 ccw(c3150.27,1782.77) 3150.27,1804.5 ccw(c3150.27,1826.23) v1@3165.64,1810.86
SPI1_NSS: HF_CORE1.25 SPI.8 | length 1215.8
  Top Layer w6: v1@3414.06,1773.64 cw(c3398.7,1758.27) 3420.43,1758.27 cw(c3442.15,1758.27) v1@3426.79,1773.64 ; SPI.8@3414.19,1754.88 ccw(c3399.15,1769.93) 3420.43,1769.93 ccw(c3441.7,1769.93) SPI.8@3426.66,1754.88 ; v1@3415.41,1772.52 cw(c3410.88,1765.76) 3418.74,1763.65 ; v1@3415.93,1772.21 cw(c3409.51,1761.1) 3421.9,1764.42 ; 3418.95,1764.42 cw(c3431.34,1761.1) v1@3424.93,1772.21 ; SPI.8@3420.43,1727 v1(3420.43,1780) ; 3422.11,1763.65 cw(c3429.97,1765.76) v1@3425.44,1772.52
  Bottom Layer w6: v1@2868.64,2304.64 cw(c2853.27,2289.27) 2875,2289.27 cw(c2896.73,2289.27) v1@2881.36,2304.64 ; v1(2875,2311) 2875,2004 3149,1730 3370.43,1730 v1(3420.43,1780) ; v1@3411.43,1780 cw(c3389.7,1780) 3405.06,1764.64 cw(c3420.43,1749.27) v1@3420.43,1771
SPI1_SCK: HF_CORE1.26 SPI.7 | length 1125.8
  Top Layer w6: v1@3365.06,1773.64 cw(c3349.7,1758.27) 3371.43,1758.27 cw(c3393.15,1758.27) v1@3377.79,1773.64 ; SPI.7@3365.19,1754.88 ccw(c3350.15,1769.93) 3371.43,1769.93 ccw(c3392.7,1769.93) SPI.7@3377.66,1754.88 ; v1@3366.41,1772.52 cw(c3361.88,1765.76) 3369.74,1763.65 ; v1@3366.93,1772.21 cw(c3360.51,1761.1) 3372.9,1764.42 ; 3369.95,1764.42 cw(c3382.34,1761.1) v1@3375.93,1772.21 ; SPI.7@3371.43,1727 v1(3371.43,1780) ; 3373.11,1763.65 cw(c3380.97,1765.76) v1@3376.44,1772.52
  Bottom Layer w6: v1@2908.64,2304.64 cw(c2893.27,2289.27) 2915,2289.27 cw(c2936.73,2289.27) v1@2921.36,2304.64 ; v1(2915,2311) 2915,1986 3157,1744 3335.43,1744 v1(3371.43,1780) ; v1@3362.43,1780 cw(c3340.7,1780) 3356.06,1764.64 cw(c3371.43,1749.27) v1@3371.43,1771
SWCLK: HF_CORE1.71 R20.2 SWD.3 | length 2521.3
  Top Layer w10: R20.2@2410,2695 2414.43,2690.57 v1(2440.57,2690.57) ; R20.2@2417.07,2682.93 cw(c2435.53,2664.47) v1@2435.53,2690.57 ; R20.2@2417.07,2697.07 ccw(c2432.76,2712.76) v1@2432.76,2690.57 ; R20.2@2424.66,2687.66 cw(c2427.98,2675.3) v1@2436.12,2685.17 ; 2425.05,2692.64 ccw(c2427.87,2703.14) v1@2435.6,2695.5 ; 2426.96,2688.28 ccw(c2423.74,2700.3) v1@2434.51,2694.07 ; 2428.45,2691.73 cw(c2425.86,2682.08) v1@2434.51,2687.07 ; v1@2435.63,2685.63 ccw(c2423.68,2673.68) 2423.68,2690.57 ccw(c2423.68,2707.47) v1@2435.63,2695.52 ; v1(2685,2975) v1(3430,2975) ; v1@2689.95,2970.05 cw(c2701.9,2958.1) 2701.9,2975 cw(c2701.9,2991.9) v1@2689.95,2979.95 ; v1@3425.05,2970.05 ccw(c3413.1,2958.1) 3413.1,2975 ccw(c3413.1,2991.9) v1@3425.05,2979.95
  Bottom Layer w6: SWD.3@2425.57,2690.57 SWD.3@2430,2695
  Bottom Layer w10: SWD.3@2406,2690.57 2425.57,2690.57 v1(2440.57,2690.57) ; SWD.3@2427.01,2687.45 ccw(c2430.33,2703.47) v1@2441.9,2691.9 ; SWD.3@2429.04,2697.24 ccw(c2434.84,2725.16) 2455,2705 ; SWD.3@2433.27,2686.73 cw(c2440.57,2681.72) v1(2440.57,2690.57) ; SWD.3@2433.27,2694.42 ccw(c2440.57,2699.42) v1(2440.57,2690.57) ; SWD.3@2435.63,2685.63 ccw(c2423.68,2673.68) 2423.68,2690.57 ccw(c2423.68,2707.47) SWD.3@2435.63,2695.52 ; v1@2440.57,2697.57 ccw(c2440.57,2714.47) 2452.52,2702.52 ccw(c2464.47,2690.57) v1@2447.57,2690.57 ; v1@2680.05,2970.05 ccw(c2668.1,2958.1) 2668.1,2975 ccw(c2668.1,2991.9) v1@2680.05,2979.95 ; v1(2685,2975) 2535,2975 2455,2895 2455,2705 ; 3420,2991.9 ccw(c3446.9,2991.9) v1@3427.88,2972.88 ; 3420,3016.04 ccw(c3471.04,3016.04) v1@3434.95,2979.95 ; v1(3430,2975) 3420,2985 3420,3705 v1(3465,3750) ; v1@3458,3750 cw(c3441.1,3750) 3453.05,3738.05 cw(c3465,3726.1) v1@3465,3743 ; SWD.3@2425.58,2690.57 cw(c2425.58,2678.01) 2435.21,2686.08 ccw(c2425.58,2678.01) SWD.3@2425.58,2690.57 ; SWD.3@2425.58,2690.57 ccw(c2425.58,2703.14) 2435.21,2695.07 cw(c2425.58,2703.14) SWD.3@2425.58,2690.57 ; v1(2440.57,2690.57) 2455,2705
SWDIO: HF_CORE1.70 R21.2 SWD.4 | length 2474.5
  Top Layer w10: R21.2@2410,2630 2421.58,2641.57 v1(2440,2641.57) ccw(c2440,2616.14) R21.2@2418.47,2629.68 ; v1@2433.38,2643.85 cw(c2424.98,2646.75) 2427.28,2638.17 cw(c2429.58,2629.59) v1@2435.41,2636.29 ; v1@2435.05,2636.63 ccw(c2423.1,2624.68) 2423.1,2641.57 ccw(c2423.1,2658.47) v1@2435.05,2646.52 ; v1(2685,2930) v1(3430,2930) ; v1@2689.95,2925.05 cw(c2701.9,2913.1) 2701.9,2930 cw(c2701.9,2946.9) v1@2689.95,2934.95 ; v1@3425.05,2925.05 ccw(c3413.1,2913.1) 3413.1,2930 ccw(c3413.1,2946.9) v1@3425.05,2934.95
  Bottom Layer w10: SWD.4@2406,2641.57 SWD.4@2428.43,2641.57 ; SWD.4@2432.47,2636.76 cw(c2444.1,2625.13) 2444.1,2641.57 cw(c2444.1,2658.02) SWD.4@2432.47,2646.39 ; SWD.4@2433.41,2637.94 cw(c2440,2633.79) v1(2440,2641.57) ; SWD.4@2433.41,2645.21 ccw(c2440,2649.36) v1(2440,2641.57) ; SWD.4@2435.05,2636.63 ccw(c2423.1,2624.68) 2423.1,2641.57 ccw(c2423.1,2658.47) SWD.4@2435.05,2646.52 ; v1@2440,2648.57 ccw(c2440,2681.35) 2463.17,2658.17 ; v1@2680.05,2925.05 ccw(c2668.1,2913.1) 2668.1,2930 ccw(c2668.1,2946.9) v1@2680.05,2934.95 ; v1(2685,2930) 2525,2930 2475,2880 2475,2670 2446.57,2641.57 v1(2440,2641.57) ; v1@3430,2927 ccw(c3430,2943.9) 3441.95,2931.95 ; v1(3430,2930) 3440,2930 3465,2955 3465,3000 3445,3020 3445,3685 3505,3745 v1(3505,3750) ; v1@3430,2937 ccw(c3430,2978.04) 3459.02,2949.02 ; 3489.51,3729.51 ccw(c3469.03,3750) v1@3498,3750
TIM1_PWMOUT1: motor1.2 R25.2 SERVO1.10 | length 1788.5
  Top Layer w6: v1(2339,1780) 2354,1765 ; v1@2339.15,1771 cw(c2339.51,1750.51) 2354,1765 ; v1@2348,1779.85 ccw(c2368.49,1779.49) 2354,1765 ; 2504.05,1615.95 ccw(c2557.33,1669.24) SERVO1.10@2571.22,1595.18 ; 2512.09,1607.91 ccw(c2559.87,1655.69) SERVO1.10@2572.32,1589.28 ; 2520.13,1599.87 ccw(c2562.41,1642.14) SERVO1.10@2573.43,1583.38 ; 2528.18,1591.83 ccw(c2564.95,1628.6) SERVO1.10@2574.53,1577.48 ; 2536.22,1583.78 ccw(c2567.49,1615.05) SERVO1.10@2575.64,1571.59 ; 2544.26,1575.74 ccw(c2570.03,1601.51) SERVO1.10@2576.75,1565.69 ; SERVO1.10@2548.67,1571.75 ccw(c2545,1571.3) 2545,1575 ; SERVO1.10@2548.67,1578.25 cw(c2545,1578.7) 2545,1575 ; SERVO1.10@2570.11,1601.07 cw(c2554.79,1682.78) 2496,1624 ; SERVO1.10@2575,1575 2545,1575 ; 2354,1765 2425,1765 2496,1694 2496,1624 ; 2496,1624 2545,1575
  Bottom Layer w6: R25.2@2326.51,2351.51 cw(c2306.03,2331.03) 2335,2331.03 cw(c2363.97,2331.03) R25.2@2343.48,2351.51 ; R25.2@2335,2360 2335,2040 2460,1915 2460,1766 ; v1@2339,1771 cw(c2339,1749.27) 2354.36,1764.64 cw(c2369.73,1780) v1@2348,1780 ; v1(2339,1780) 2369.21,1749.79 ; motor1.2@2379.18,1744.66 ccw(c2369.21,1737.53) 2369.21,1749.79 ; motor1.2@2379.18,1754.91 cw(c2369.21,1762.04) 2369.21,1749.79 ; motor1.2@2428.86,1746.7 ccw(c2433.11,1763.18) 2445.14,1751.14 ; motor1.2@2430.36,1752.51 ccw(c2436.16,1774.99) 2452.57,1758.57 ; motor1.2@2431.86,1758.32 ccw(c2439.2,1786.79) 2460,1766 ; motor1.2@2437.56,1745.91 cw(c2443.79,1742.86) 2443.79,1749.79 ; motor1.2@2437.56,1753.67 ccw(c2443.79,1756.72) 2443.79,1749.79 ; 2369.21,1749.79 motor1.2@2408,1749.79 2443.79,1749.79 ; 2443.79,1749.79 2460,1766